# Altium PCB PCB1.PcbDoc
Units mm, origin at the board's own origin, x right, y up, seen from the top; angles counter-clockwise.
Board outline 53.5 x 43.25 mm, 2 copper layers (L1 (Signal), L4 (Signal)), stack 0.695 mm thick; 43 components, 44 nets, 206 pads, 83 vias.
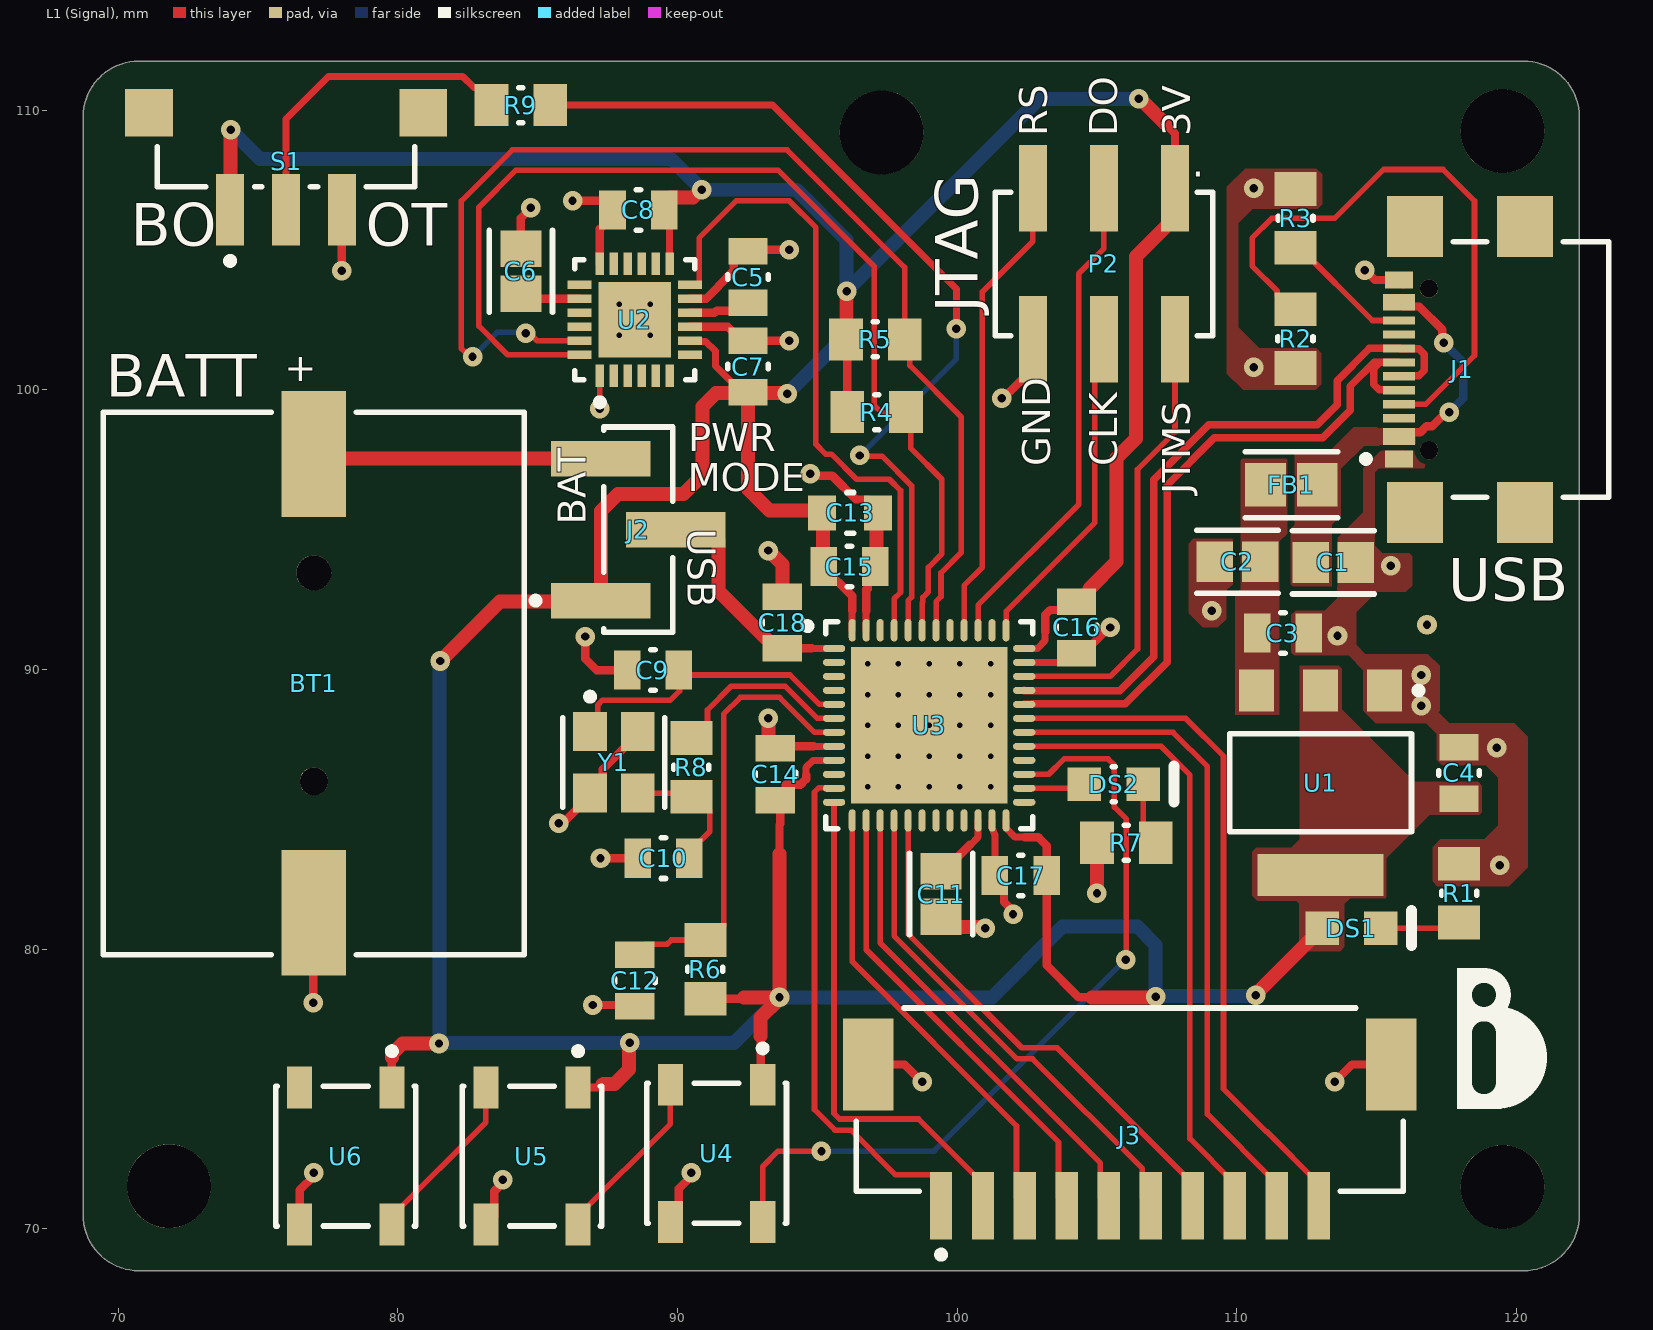
[diagram p0: L1 (Signal) view]
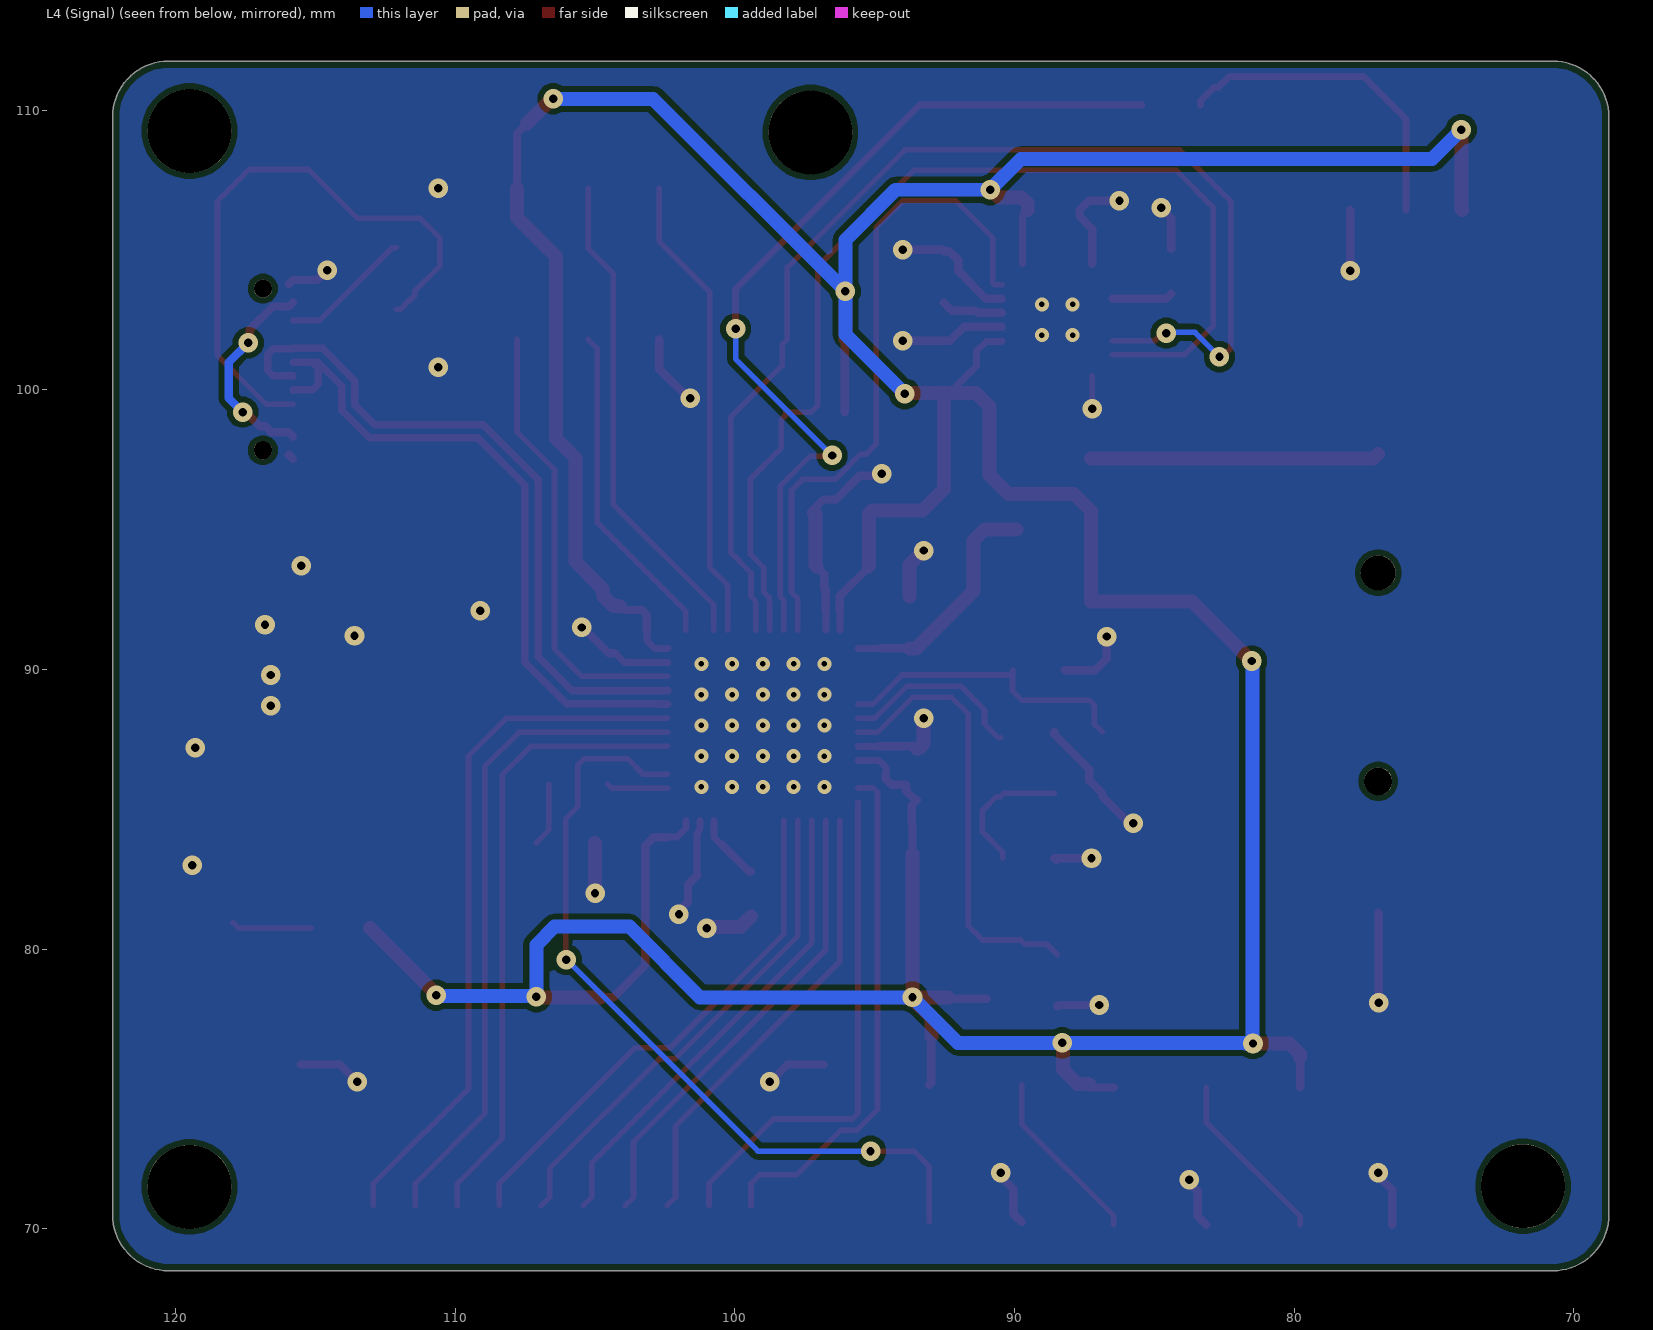
[diagram p1: L4 (Signal) view, seen from below]
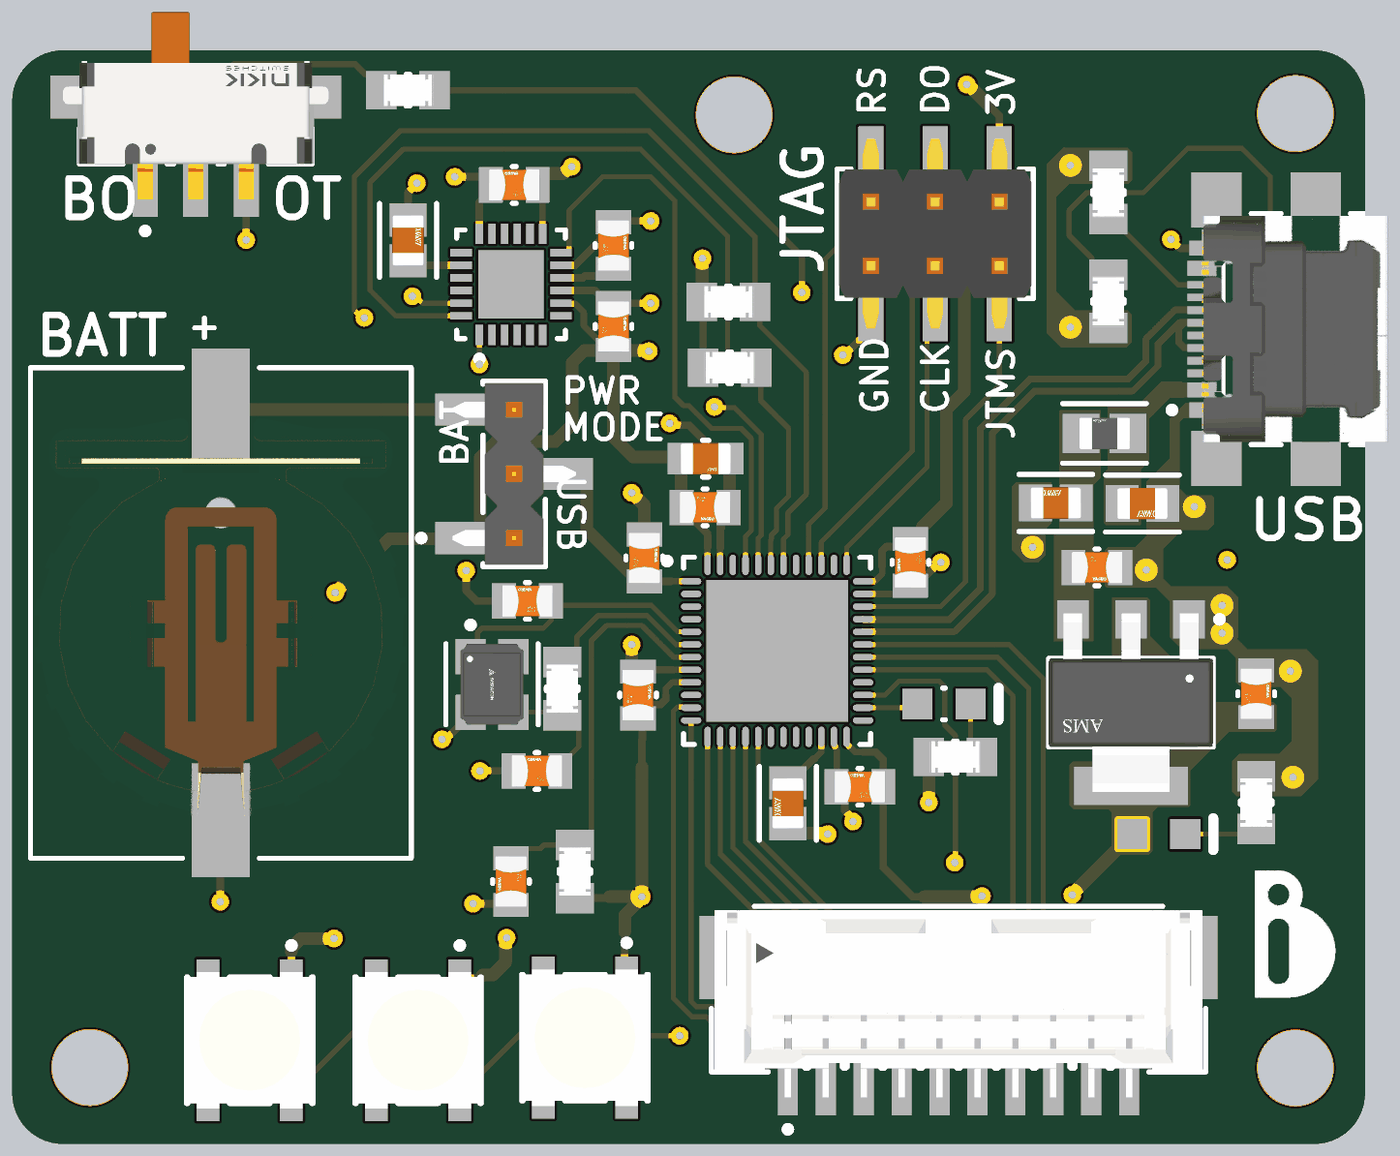
[diagram p2: 3D render of the assembled board from above, using the file's embedded part models]

## Layer stack, top to bottom
Top Solder: solder mask 0.0254, SM-001, Dk 4
L1 (Signal): signal copper 0.0152
Dielectric 3: core 0.665, Core-039, Dk 4.6
L4 (Signal): signal copper 0.0152
Bottom Solder: solder mask 0.0254, SM-001, Dk 4

## Board outline
68.75,70.5 68.75,109.75 cw(c70.75,109.75) 70.75,111.75 120.25,111.75 cw(c120.25,109.75) 122.25,109.75 122.25,70.5 cw(c120.25,70.5) 120.25,68.5 70.75,68.5 cw(c70.75,70.5)

## Design rules (kind name [scope] priority, off if disabled: settings)
Clearance Clearance_2 [InNamedPolygon('+5V_L01_P001')] p1: gap=0.254 ignorepadtopadclearanceinfootprint=FALSE except(0: Arc-Poly Arc-Region Track-Poly Track-Region SMDPad-Poly SMDPad-Region THPad-Poly THPad-Region Via-Poly Via-Region Fill-Poly Fill-Region Poly-Poly Poly-Region Region-Region)
Clearance Clearance_1 [InNamedPolygon('+5V_L01_P001')] p2: gap=0.254 ignorepadtopadclearanceinfootprint=FALSE except(0: Arc-Poly Track-Poly SMDPad-Poly THPad-Poly Via-Poly Fill-Poly Poly-Poly)
Clearance [All] p3: gap=0.2 ignorepadtopadclearanceinfootprint=FALSE
DiffPairsRouting [All] p1: maxlimit=0.203 minlimit=0.203 mostfreqgap=0.203 toplayer_minwidth=0.267 toplayer_maxwidth=0.6 toplayer_prefwidth=0.56 bottomlayer_minwidth=0.267 bottomlayer_maxwidth=0.6 bottomlayer_prefwidth=0.56 impedanceprofiledriven=TRUE impedanceprofileid={9241E178-140B-433B-9AB5-E28A3F8913A7} impedanceprofilevalue=90.000000 maxuncoupledlength=12.7
HoleSize [All] p1: absolutevalues=TRUE maxlimit=4 minlimit=0.025 maxpercent=80.000 minpercent=20.000
MinimumSolderMaskSliver [HasFootprint('IS-QFN-24_V') vs InPadClass('All Pads') And OnLayer('L1 (Signal)')] p1: minsoldermaskwidth=0.04
PolygonConnect [All] p1: thpad.connectstyle=Relief thpad.reliefconductorwidth=0.254 thpad.reliefentries=4 thpad.polygonreliefangle="90 Angle" thpad.airgapwidth=0.254 smdpad.connectstyle=Direct smdpad.reliefconductorwidth=0.254 smdpad.reliefentries=4 smdpad.polygonreliefangle="90 Angle" smdpad.airgapwidth=0.254 via.connectstyle=Direct via.reliefconductorwidth=0.254 via.reliefentries=4 via.polygonreliefangle="90 Angle" via.airgapwidth=0.254
RoutingVias [All] p1: holewidth=0.3 width=0.7 viastyle="Through Hole" minholewidth=0.25 minwidth=0.55 maxholewidth=0.4 maxwidth=0.9
SilkToSolderMaskClearance [IsPad] p1: minsilkscreentomaskgap=0.127 clearancetoexposedcopper=TRUE
SolderMaskExpansion [All] p1: expansion=0.102 istentingtop=FALSE
UnRoutedNet [All] p1: checkbadconnections=TRUE
Width [All] p1: maxlimit=1 minlimit=0.2 preferedwidth=0.3 minimp=50.000000 maximp=50.000000 favimp=50.000000
25 further rules are at their usual default settings.

## Classes and differential pairs
net class DIFF_USB: USB_D_N USB_D_P
differential pair USB_D: +USB_D_P -USB_D_N

## Components (designator, comment, footprint, x,y, rotation, side; value= is the part's Value field where it differs from the comment)
BT1 "CR-1220" FP-S8411-45R-MFG 77,89.5 r180 top
C1 "2u2" FP-0805-L_2_01_0_2-W_1_25-IPC_B 113.45,93.825 r0 top
C2 "2u2" FP-0805-L_2_01_0_2-W_1_25-IPC_B 110.025,93.85 r180 top
C3 "22u" FP-CC0805-0_85-MFG 111.65,91.3 r0 top value="100 nF"
C4 "22u" FP-CC0805-0_85-MFG 117.95,86.299 r90 top value="100 nF"
C5 "100n" FP-CC0805-0_85-MFG 92.529,104.029 r90 top value="100 nF"
C6 "2n2" FP-0805-L_2_01_0_2-W_1_25-IPC_B 84.404,104.235 r90 top
C7 "10n" FP-CC0805-0_85-MFG 92.529,100.829 r90 top value="100 nF"
C8 "100n" FP-CC0805-0_85-MFG 88.604,106.429 r180 top value="100 nF"
C9 "10p" FP-CC0805-0_85-MFG 89.125,89.975 r180 top value="100 nF"
C10 "10p" FP-CC0805-0_85-MFG 89.5,83.25 r180 top value="100 nF"
C11 "2u2" FP-0805-L_2_01_0_2-W_1_25-IPC_B 99.425,81.969 r270 top
C12 "100n" FP-CC0805-0_85-MFG 88.475,78.875 r270 top value="100 nF"
C13 "4.7u" FP-0805-L_2_01_0_2-W_1_25-MFG 96.175,95.6 r0 top
C14 "100n" FP-CC0805-0_85-MFG 93.5,86.25 r90 top value="100 nF"
C15 "100n" FP-CC0805-0_85-MFG 96.15,93.675 r0 top value="100 nF"
C16 "100n" FP-CC0805-0_85-MFG 104.275,91.5 r270 top value="100 nF"
C17 "100n" FP-CC0805-0_85-MFG 102.275,82.625 r180 top value="100 nF"
C18 "100n" FP-CC0805-0_85-MFG 93.75,91.675 r90 top value="100 nF"
DS1 "1K" AVAG-HSMX-C170_V 114.1,80.75 r0 top
DS2 "LTST-C170KRKT" LTST-C170KRKT_V 105.6,85.9 r0 top
FB1 "120R" FP-BLM21-0_2-t0_85-e0_5-IPC_A 111.95,96.6 r180 top
J1 "USB4110-GF-A" FP-USB4110-GF-A-MFG 119.48,100.725 r90 top
J2 "5-146128-1" FP-5-146128-1-MFG 88.6,95 r90 top
J3 "502584-1070" FP-502584-1070-MFG 106.175,74.62 r0 top
P2 "JTAG CONN" 61000621121 105.25,104.5 r180 top
R1 "1K" FP-CRCW0805-e3-IPC_A 117.95,81.999 r90 top
R2 "5K1" FP-CRCW0805-e3-IPC_A 112.1,101.825 r270 top
R3 "5K1" FP-CRCW0805-e3-IPC_A 112.102,106.127 r90 top
R4 "2K2" FP-CRCW0805-e3-IPC_A 97.125,99.2 r180 top
R5 "2K2" FP-CRCW0805-e3-IPC_A 97.075,101.8 r180 top
R6 "10K" FP-CRCW0805-e3-IPC_A 91,79.275 r90 top
R7 "1K" FP-CRCW0805-e3-IPC_A 106.051,83.8 r180 top
R8 "0R" FP-CRCW0805-e3-IPC_A 90.5,86.5 r90 top
R9 "10K" FP-CRCW0805-e3-IPC_A 84.4,110.175 r180 top
S1 "SS312SAH4-R" FP-SS312SAH4-R-MFG 76.006,109.256 r270 top
U1 "AMS1117-3.3" FP-AMS1117-IPC_C 112.996,85.95 r270 top
U2 "MPU-6050" IS-QFN-24_V 88.475,102.5 r90 top
U3 "STM32F411CEU6" STM-UFQFPN48_L 99,88 r0 top
U4 "SK6812" ADA-RGB-1655_V 91.4,72.7 r270 top
U5 "SK6812" ADA-RGB-1655_V 84.8,72.6 r270 top
U6 "SK6812" ADA-RGB-1655_V 78.14,72.6 r270 top
Y1 "24MHz" FP-ABM8G-MFG 87.725,86.675 r270 top

## Footprints (in the part's own frame and the unit in brackets; to place one, negate y for a bottom-side part, rotate by r counter-clockwise, add the part's x,y. Pads: shape width x height; smd on the part's side, far side on the other; paste and mask are expansions set on the pad)
61000621121 [mm] "Pin Header, pitch 2.54 mm, SMD, Vertical, dual row, 6p"
  rect 1x3.1 smd: 1(-2.54,-2.7) 2(-2.54,2.7) 3(0,-2.7) 4(0,2.7) 5(2.54,-2.7) 6(2.54,2.7)
  silkscreen extent -3.89,-2.56 3.89,2.57, body extent -3.81,-3.75 3.81,3.75, height 9.62
ADA-RGB-1655_V [mm] "SMD, 4-Leads, Body 5x5mm"
  rect 1.5x0.9 smd: 1(-2.45,1.65) 2(-2.45,-1.65) 3(2.45,-1.65) 4(2.45,1.65)
  silkscreen extent -3.87,-2.5 2.5,2.5, body extent -2.7,-2.5 2.7,2.5, height 1.68
AVAG-HSMX-C170_V [mm] "SMD, 2-Leads, Body 2x1.25mm, Height 0.8mm"
  rect 1.2x1.2 smd: 1(-1.05,0) 2(1.05,0)
  silkscreen extent 2.15,-0.63 2.15,0.63, body extent -1,-0.63 1,0.63, height 0.8
FP-5-146128-1-MFG [mm]
  rect 1.27x3.56 smd paste+0 mask+0: 1(-2.54,1.335) 2(0,-1.335) 3(2.54,1.335)
  silkscreen extent -3.67,-1.23 3.67,3.8, body extent -3.77,-3.21 3.77,3.21, height 0.25
FP-0805-L_2_01_0_2-W_1_25-IPC_B [mm]
  rect 1.305x1.456 smd paste+0 mask+0: 1(-0.806,0) 2(0.806,0)
  silkscreen extent -1.46,-1.13 1.46,1.13, body extent -1.71,-0.98 1.71,0.98, height 0.25
FP-0805-L_2_01_0_2-W_1_25-MFG [mm]
  rect 1x1.25 smd paste+0 mask+0: 1(-1,0) 2(1,0)
  silkscreen extent -0.13,-0.72 0.13,0.72, body extent -1.6,-0.82 1.6,0.82, height 0.25
FP-502584-1070-MFG [mm]
  rect 0.8x2.4 smd paste+0 mask+0: 1(-6.75,-3.795) 2(-5.25,-3.795) 3(-3.75,-3.795) 4(-2.25,-3.795) 5(-0.75,-3.795) 6(0.75,-3.795) 7(2.25,-3.795) 8(3.75,-3.795) 9(5.25,-3.795) 10(6.75,-3.795)
  rect 1.8x3.3 smd paste+0 mask+0: 11(-9.35,1.255) 12(9.35,1.255)
  silkscreen extent -9.77,-5.67 9.77,3.27, body extent -10.35,-5.1 10.35,3.37, height 0.25
FP-ABM8G-MFG [mm]
  rect 1.4x1.2 smd paste+0 mask+0: 1(-1.1,-0.85) 2(1.1,-0.85) 3(1.1,0.85) 4(-1.1,0.85)
  silkscreen extent -2.47,-1.83 1.6,1.83, body extent -1.9,-1.55 1.9,1.55, height 0.25
FP-AMS1117-IPC_C [mm]
  rect 1.5x1.25 smd paste+0 mask+0: 1(-3.295,2.29) 2(-3.295,0) 3(-3.295,-2.29)
  rect 1.504x4.5 smd paste+0 mask+0: 4(3.295,0)
  silkscreen extent -3.42,-3.25 1.75,3.63, body extent -3.53,-3.25 3.53,3.25, height 1.8
FP-BLM21-0_2-t0_85-e0_5-IPC_A [mm]
  rect 1.455x1.556 smd paste+0 mask+0: 1(-0.926,0) 2(0.926,0)
  silkscreen extent -1.65,-1.18 1.65,1.18, body extent -2.15,-1.28 2.15,1.28, height 0.25
FP-CC0805-0_85-MFG [mm]
  rect 0.95x1.4 smd paste+0 mask+0: 1(-0.925,0) 2(0.925,0)
  silkscreen extent -0.08,-0.72 0.08,0.72, body extent -1.6,-1.05 1.6,1.05, height 0.25
FP-CRCW0805-e3-IPC_A [mil]
  rect 47.5x59.38 smd paste+0 mask+0: 1(-41.37,0) 2(41.37,0)
  silkscreen extent -3,-25 3,25, body extent -85,-49 85,49, height 10
FP-S8411-45R-MFG [mm]
  rect 2.3x4.5 smd paste+0 mask+0: 1(0,8.2) 2(0,-8.2)
  round 1 hole 1 unplated paste-2539.97 mask+0: ""(0,3.5)
  round 1.25 hole 1.25 unplated paste-2539.97 mask+0: ""(0,-3.95)
  silkscreen extent -7.52,-9.7 7.52,9.7, body extent -7.63,-10.55 7.63,10.55, height 0.25
FP-SS312SAH4-R-MFG [mm]
  rect 2.55x1 smd paste+0 mask+0: 1(2.825,-2) 2(2.825,0) 3(2.825,2)
  rect 1.7x1.7 smd paste+0 mask+0: 4(-0.65,4.9) 5(-0.65,-4.9)
  silkscreen extent 0.58,-4.6 4.77,4.6, body extent -4.1,-5.85 4.2,5.85, height 0.25
FP-USB4110-GF-A-MFG [mm]
  rect 2.18x2 smd paste+0 mask+0: 1(-5.11,3.105) 2(5.11,3.105) 3(-5.11,-0.825) 4(5.11,-0.825)
  rect 0.6x1 smd paste+0 mask+0: A1-B12(-3.2,3.68) B1-A12(3.2,3.68)
  rect 0.6x1.15 smd paste+0 mask+0: A4-B9(-2.4,3.68) B4-A9(2.4,3.68)
  rect 0.3x1.15 smd paste+0 mask+0: A5(-1.25,3.68) A6(-0.25,3.68) A7(0.25,3.68) A8(1.25,3.68) B5(1.75,3.68) B6(0.75,3.68) B7(-0.75,3.68) B8(-1.75,3.68)
  round 0.65 hole 0.65 unplated paste-2539.97 mask+0: ""(-2.89,2.605) ""(2.89,2.605)
  silkscreen extent -4.57,-3.83 4.57,4.99, body extent -6.3,-3.92 6.3,4.36, height 0.25
IS-QFN-24_V [mm] "QFN, 24-Leads, Body 4x4mm, Pitch 0.5mm, Thermal Pad 2.7x2.6mm"
  rect 0.8x0.3 smd: 1(-2,1.25) 2(-2,0.75) 3(-2,0.25) 4(-2,-0.25) 5(-2,-0.75) 6(-2,-1.25) 13(2,-1.25) 14(2,-0.75) 15(2,-0.25) 16(2,0.25) 17(2,0.75) 18(2,1.25)
  rect 0.3x0.85 smd mask+0.102: 7(-1.25,-1.975) 8(-0.75,-1.975) 9(-0.25,-1.975) 10(0.25,-1.975) 11(0.75,-1.975) 12(1.25,-1.975) 19(1.25,1.975) 20(0.75,1.975) 21(0.25,1.975) 22(-0.25,1.975) 23(-0.75,1.975) 24(-1.25,1.975)
  rect 2.7x2.6 smd: 25(0,0)
  silkscreen extent -3.07,-2.15 2.15,2.15, body extent -2,-2 2,2, height 0.95
LTST-C170KRKT_V [mm] "SMD, 2-Leads, Body 2x1.25mm"
  rect 1.2x1.2 smd: 1(-1.05,0) 2(1.05,0)
  silkscreen extent -0.05,-0.64 2.16,0.64, body extent -1,-0.63 1,0.63, height 1.2
STM-UFQFPN48_L [mm] "QFN, 48-Leads, Body 7.1x7.1mm, Pitch 0.5mm, Thermal Pad 5.6x5.6mm, IPC High Density"
  oval 0.8x0.25 smd: 1(-3.4,2.75) 2(-3.4,2.25) 3(-3.4,1.75) 4(-3.4,1.25) 5(-3.4,0.75) 6(-3.4,0.25) 7(-3.4,-0.25) 8(-3.4,-0.75) 9(-3.4,-1.25) 10(-3.4,-1.75) 11(-3.4,-2.25) 12(-3.4,-2.75) 25(3.4,-2.75) 26(3.4,-2.25) 27(3.4,-1.75) 28(3.4,-1.25) 29(3.4,-0.75) 30(3.4,-0.25) 31(3.4,0.25) 32(3.4,0.75) 33(3.4,1.25) 34(3.4,1.75) 35(3.4,2.25) 36(3.4,2.75)
  oval 0.25x0.8 smd: 13(-2.75,-3.4) 14(-2.25,-3.4) 15(-1.75,-3.4) 16(-1.25,-3.4) 17(-0.75,-3.4) 18(-0.25,-3.4) 19(0.25,-3.4) 20(0.75,-3.4) 21(1.25,-3.4) 22(1.75,-3.4) 23(2.25,-3.4) 24(2.75,-3.4) 37(2.75,3.4) 38(2.25,3.4) 39(1.75,3.4) 40(1.25,3.4) 41(0.75,3.4) 42(0.25,3.4) 43(-0.25,3.4) 44(-0.75,3.4) 45(-1.25,3.4) 46(-1.75,3.4) 47(-2.25,3.4) 48(-2.75,3.4)
  rect 5.6x5.6 smd: 49(0,0)
  silkscreen extent -4.47,-3.7 3.7,3.7, body extent -3.55,-3.55 3.55,3.55, height 0.6

## Part data
BT1: library part CMP-15817-000007-1, "BATTERY HOLDER COIN 12MM SMD", Case/Package=SMD/SMT, Max Operating Temperature=105°C, Min Operating Temperature=-55°C, Package Quantity=500, Contact Plating=Bronze, Material=Polyphenylene, Mount="Surface Mount", Number of Batteries=1, Number of Cells=1, Packaging="Tape and Reel", REACH SVHC="No SVHC", Termination=SMD/SMT
C1 C2 C6 C11: library part CMP-2000-05810-2, "General Purpose Ceramic Capacitor, 0805, 2.2uF, 10%, X5R, 15%, 10V", Capacitance=2.2uF, Case Code (Imperial)=0805, Case Code (Metric)=2012, Dielectric=X5R, Dielectric Material=Ceramic, Insulation Resistance=500MR, Max Operating Temperature=85°C, Min Operating Temperature=-55°C, Package Quantity=1, Tolerance=10%, Voltage=10V, Case/Package=0805, Construction=Flat, Contact Plating=Tin, Depth=1.25mm, Dissipation Factor=5%, Height=1.4mm, Lead Free="Lead Free", Length=2.01mm, Mount="Surface Mount", Number of Pins=2, Packaging="Tape and Reel", Radiation Hardening=No, REACH SVHC="No SVHC", RoHS Compliant=Yes, Series=-, Size=1.4mm, Termination=SMD/SMT, Thickness=0.055inch, Voltage Rating=10V, Voltage Rating (DC)=10V, Width=0.049inch
C3 C4 C5 C7 C8 C9 C10 C12 C14 C15 C16 C17 C18: library part CMP-1036-04402-6, "CAP CER 0.1UF 16V X7R 0805", Capacitance="100 nF", Manufacturer=Yageo, Manufacturer Part Number=CC0805KRX7R7BB104, Package=CC0805-0.85, Temperature="-30°C to +85°C", Temperature Characteristic=X7R, Temperature Range High=+85°C, Temperature Range Low=-30°C, Tolerance=0.1, Voltage Rating="16 V", Automotive=No, Category=Cap, ComponentLink2Description=Datasheet, ComponentLink2URL=http://www.yageo.com/documents/recent/UPY-GPHC_Y5V_6.3V-to-50V_8.pdf, Device Class L1="Passive Components", Device Class L2=Capacitors, Device Class L3="Ceramic Capacitors", Digikey Description="CAP CER 0.1UF 16V X7R 0805", Footprint Url=http://www.yageo.com/exep/pages/download/literatures/UPY-C_GEN_24.pdf, Height=0.95mm, Ipc Land Pattern Name=CAPC200125X85, Lead Free=Yes, Material=Ceramic, Mouser Description="Multilayer Ceramic Capacitors MLCC - SMD/SMT 100nF 16V X7R 10%", Octopart=https://octopart.com/cc0805krx7r7bb104-yageo-39467769, RoHS=TRUE
C13: library part CMP-2007-04518-2, "General Purpose Ceramic Capacitor, 0805, 4.7uF, 10%, X7R, 15%, 16V", Capacitance=4.7uF, Case Code (Imperial)=0805, Case Code (Metric)=2012, Dielectric=X7R, Max Operating Temperature=125°C, Min Operating Temperature=-55°C, Package Quantity=1, Tolerance=10%, Voltage=10V, Voltage Rating=16V, Case/Package=0805, Construction=Flat, Contact Plating=Tin, Depth=1.25mm, Dissipation Factor=3.5%, Height=1.52mm, Lead Free="Lead Free", Length=2.01mm, Mount="Surface Mount", Number of Pins=2, Packaging="Tape and Reel", Radiation Hardening=No, REACH SVHC="No SVHC", RoHS Compliant=Yes, Series=-, Termination=SMD/SMT, Thickness=0.06inch, Voltage Rating (DC)=16V, Width=0.049inch
DS1: library part CMP-2000-05062-1, "Chip LED, Green, 2.2 V, -40 to 85 degC, 2-Pin SMD, Pb-Free, Tape and Reel", Forward Current If=20mA, Forward Voltage=2.2V, Forward Voltage VF Max=2.6V, LED Colour=Green, Manufacturer=Avago, Operating Temperature Max=85degC, Operating Temperature Min=-30degC, Operating Temperature Range=-30degCto+85degC, Opto Case Style=SMD, Package Description="2-Pin Surface Mount Device, Body 2 x 1.25 mm, Height 0.8 mm", Package Reference=HSMX-C170, Storage Temperature Min=-40degC, Bulb Size=1.25mmx1.4mm, Datasheet URL=https://datasheet.ciiva.com/29280/180495-da-01-en-chip-led-hsmg-c170-gelb-gruen-29280971.pdf, Datasheet Version=Oct-08, Dominant Wavelength=572nm, Dominant Wavelength Typ=572nm, External Depth=0.8mm, External Length / Height=2mm, External Width=1.25mm, Forward Current If Max=20mA, LED Mounting=SMD, LED Type=Standard, Lens Shape=Rectangular, Light Area Height=1mm, Luminous Intensity=15mcd, Luminous Intensity Min=4mcd, Luminous Intensity Typ=15mcd, Manufacturer URL=http://www.avagotech.com/, Mounting Type=SMD, MSL=MSL2A-4weeks, No. of Pins=2, Opto Mounting Orientation=Top, Packaging=CutTape, Peak Forward Current=20mA, Peak Wavelength=570nm, PIV Max=5V, Storage Temperature Max=85degC, SVHC=NoSVHC(16-Jun-2014), Viewing Angle=170deg, Voltage Vf Typ=2.2V, Wavelength Typ=570nm
DS2: library part CMP-2000-07593-1, "LED Red, 75 mW, 54 mcd, -55 to 85 degC, 2-Pin SMD, RoHS, Tape and Reel", Case Code (Imperial)=0805, Case Code (Metric)=2012, Colour=Red, Forward Current=30mA, Forward Voltage=2V, Lens Colour=Colorless, Manufacturer=Lite-On, Max Operating Temperature=85degC, Min Operating Temperature=-55degC, Package Description="2-Pin Surface Mount Device, Body 2 x 1.25 mm", Package Quantity=1, Package Reference=C170KRKT, Power Dissipation=75mW, Test Current=20mA, Case\/Package=0805, Datasheet URL=http://optoelectronics.liteon.com/upload/download/DS-22-99-0150/LTST-C170KRKT.pdf, Datasheet Version="Rev. D, 11/2014", Depth=1.6mm, Dominant Wavelength=631nm, Height=1.1mm, Illumination Colour=Red, Lead Free=LeadFree, Length=3.2mm, Lens Style=Rectangular, Lens Transparency=Clear, Luminous Intensity=54mcd, Manufacturer URL=http://www.us.liteon.com/, Mount=SurfaceMount, Mounting Technology=SurfaceMount, Number of Elements=1, Number of LEDs=1, Number of Pins=2, Packaging=TapeandReel, Power Rating=75mW, Radiation Hardening=No, RoHSCompliant=True, Viewing Angle=130degrees, Wavelength=639nm, Width=1.25mm
FB1: library part CMP-0686-00716-3, "FERRITE BEAD 120 OHM 0805 1LN", Case Code (Imperial)=0805, Case Code (Metric)=2012, Current Rating=800mA, DC Current=200mA, DC Resistance (DCR)=100mR, Frequency=100MHz, Max Current Rating=1A, Max Operating Temperature=125°C, Min Operating Temperature=-55°C, Package Quantity=1, Resistance=150mR, Tolerance=25%, Case/Package=0805, Core Material=Ferrite, DC Resistance-Max=100mR, Depth=1.25mm, Height=0.85mm, Impedance=120R, Lead Free="Lead Free", Length=2mm, Material=Steel, Max DC Current=200mA, Military Standard=Not, Number of Circuits=1, Number of Lines=1, Number of Pins=2, Packaging="Tape and Reel", Radiation Hardening=No, REACH SVHC="No SVHC", Series=BLM21A, Shielding=Unshielded, Termination=SMD/SMT, Test Frequency=100MHz, Width=1.25mm
J1: library part CMP-245163-000002-1, "CONN USB 2.0 TYPE-C R/A SMT", Current Rating=3/4.25/1.25/0.25A, Manufacturer=GCT, Package=0, Temperature="-40°C to +85°C", Temperature Range High=+85°C, Temperature Range Low=-40°C, Voltage Rating=20V, Automotive=No, Category=Conn, ComponentLink2Description=Datasheet, ComponentLink2URL=https://gct.co/files/drawings/usb4110.pdf, Conn Orientation="Right Angle", Contact Material=Gold,Nickel, Device Class L1=Connectors, Device Class L2="USB Connectors", Device Class L3=unset, Digikey Description="CONN USB 2.0 TYPE-C R/A SMT", Height=3.46mm, Is Female=yes, Lead Free=Yes, Manufacturer Part Number=USB4110-GF-A, Number Of Contacts=16, Octopart=https://octopart.com/usb4110-gf-a-gct-103941985, RoHS=TRUE, Shielding=true, Standoff Height=0.1mm, Usb Standard="USB 2.0"
J2: library part CMP-03369-000030-1, "CONN HEADER SMD 3POS 2.54MM", Current Rating=3A, Manufacturer=TE, Package=HDR3, Temperature="-65°C to +125°C", Temperature Range High=+125°C, Temperature Range Low=-65°C, Voltage Rating=30V, Automotive=No, Category=Conn, ComponentLink2Description=Datasheet, ComponentLink2URL=https://www.te.com/global-en/product-5-146128-1.html, Conn Gender=Male, Conn Orientation=Straight, Contact Material=Gold,Nickel, Device Class L1=Connectors, Device Class L2="Headers and Wire Housings", Device Class L3=unset, Digikey Description="CONN HEADER SMD 3POS 2.54MM", Footprint Url=https://www.te.com/commerce/DocumentDelivery/DDEController?Action=srchrtrv&DocNm=146128&DocType=Customer+Drawing&DocLang=English, Height=10.1092mm, Lead Free=Yes, Manufacturer Part Number=5-146128-1, Mouser Description="AMPMODU 3 Position Surface Mount Single Row Straight 2.54 mm Breakaway Header", Number Of Contacts=3, Number of Rows=1, Octopart=https://octopart.com/5-146128-1-te+connectivity-40948200, Pitch=2.54mm, RoHS=TRUE
J3: library part CMP-00257-18669480-1, "502584-1070 1.5 W/B Sgl ST RecAssy10CktEmbsTpPkg", Case/Package=SIL, Color=Beige, Current Rating=2A, Manufacturer Lifecycle Status=ACTIVE, Max Operating Temperature=85°C, Min Operating Temperature=-40°C, Voltage Rating=100V, Connector Type="Center Strip Contact, Receptacle", Contact Gender=Female, Contact Material="Copper, Tin", Contact Plating=Tin, Country of Origin=JP, Depth=6.35mm, Fastening Type=Latch, Gender=Receptacle, Glow Wire Compliant=Non-compliant, Height=7.5mm, Housing Color=Beige, Housing Material=Resin, Length=19.3mm, Lifecycle Status=Production, Mount="Surface Mount", NexarPartId=18669480, Number of Circuits=10, Number Of Contacts=10, Number of Pins=10, Number of Positions=10, Number of Rows=1, Orientation=Vertical, Packaging="Cut Tape", Pitch=1.5mm, Radiation Hardening=No, REACH SVHC=Unknown, RoHS=Compliant, Termination=Solder
P2: library part CMP-1502-01024-2, Color=Black, Contact Resistance=20mΩ, Current Rating=3A, Operating Supply Voltage=250V, Connector Type="Male Pin", Contact Material=Copper, Contact Mating Length=5.9944mm, Contact Plating=Gold, Gender=Male, Lead Pitch=2.54mm, Mount="Surface Mount", NexarPartId=32855428, Number Of Contacts=6, Number of Pins=6, Number of Positions=6, Number of Rows=2, Orientation=Vertical, Pitch=2.54mm, REACH SVHC=Unknown, RoHS=Compliant, Row Spacing=2.54mm, Termination=Solder
R1 R2 R3 R4 R5 R6 R7 R8 R9: library part CMP-2001-04908-2, "RES Thick Film, 10kΩ, 1%, 0.125W, 100ppm/°C, 0805", Case Code (Imperial)=0805, Case Code (Metric)=2012, Max Operating Temperature=155°C, Min Operating Temperature=-55°C, Package Quantity=5000, Power Rating=125mW, Resistance=10kR, Temperature Coefficient=100ppm/°C, Tolerance=1%, Voltage Rating=150V, Case/Package=0805, Composition="Thick Film", Contact Plating=Tin, Depth=1.25mm, Height=0.45mm, Lead Free="Lead Free", Length=2mm, Military Standard=Not, Packaging="Tape and Reel", Radiation Hardening=No, Termination=SMD/SMT, Voltage Rating (DC)=150V, Weight=0.000194oz, Width=1.25mm
S1: library part CMP-31746-000001-1, "SWITCH SLIDE SPDT 0.4VA 28V", Case/Package=SMD/SMT, Max Current Rating=100mA, Max Operating Temperature=85°C, Max Voltage Rating (AC)=28V, Min Operating Temperature=-25°C, Package Quantity=1, Actuator Length=2mm, Actuator Material=Polyphenylene, Actuator Type=Standard, Contact Material=Bronze, Contact Plating=Gold, Contact Style=Shorting, Depth=7.45mm, Electrical Life=10000Cycles, Housing Material=Bronze, Lead Free="Lead Free", Length=10.5mm, Max Voltage Rating (DC)=28V, Mechanical Life=10000Cycles, Mount="Surface Mount", Orientation="Right Angle", Packaging="Tape and Reel", REACH SVHC="No SVHC", RoHS Compliant=Yes, Series=SS3, Switch Function=On-On, Switch Travel=2mm, Termination="Gull Wing", Throw Configuration=SPDT, Voltage Rating (AC)=28V, Voltage Rating (DC)=28V
U1: library part CMP-209535-000001-1, "LDO Voltage Regulators 1A, 3.3V", Dropout Voltage=1.1V, Manufacturer="Advanced Monolithic Systems", Max Junction Temp=+125°C, Max Power Dissipation=1.2W, Max Supply Voltage=15V, Nominal Supply Current=5mA, Output Current=1A, Output Voltage=3.3V, Package=AMS1117, Temperature="-40°C to +125°C", Temperature Range Low=-40°C, Automotive=No, Category=IC, ComponentLink2Description=Datasheet, ComponentLink2URL=http://www.advanced-monolithic.com/pdf/ds1117.pdf, Device Class L1="Integrated Circuits (ICs)", Device Class L2="Power Management ICs", Device Class L3="Voltage Regulators - Linear", Height=1.8mm, Ipc Land Pattern Name=SOT229P700X180-4, Lead Free=Yes, Manufacturer Part Number=AMS1117-3.3, Number Of Outputs=1, Octopart=https://octopart.com/ams1117-3.3-advanced+monolithic+systems-25899300, Output Type=Fixed, RoHS=TRUE, Standoff Height=0.64mm, Temperature Range High=+125°C
U2: library part CMP-1753-00002-2, "3-Axis Gyroscope, Accelerometer and a Digital Motion Processor(TM) (DMP), 2.375 to 3.46 V, -40 to 85 degC, 24-Pin QFN, RoHS, Tape and Reel", Manufacturer=InvenSense, Standard Package=5,000, Category=Sensors,Transducers, Datasheet URL=http://datasheet.octopart.com/MPU-6050-InvenSense-datasheet-14421344.pdf, Datasheet Version="Rev. 3.3, 05/2012", Dynamic Catalog=MPU-6000™Series, Family=Multifunction, Featured Product=MPU-60506-Axis,IntegratedI²CSolution, Manufacturer URL=http://www.invensense.com/, Online Catalog=MPU-6000™Series, Other Names="1428-1007-2 / MPU6050", Output Type=Digital, Sensor Type=MotionTracking, Unit PriceUSD=Digital
U3: library part CMP-0243-00165-1, "ARM Cortex-M4 32-bit MCU+FPU, 512 KB Flash, 128 KB RAM, 36 I/Os, 48-Pin UFQFPN, -40 to 85 degC, Tray", I/Os (High Current)=36, Operating Frequency(F) (Processor speed) (MHz)=100, Package Description=UFQFPN48, Package Reference="48-Pin Ultra Thin Fine Pitch Quad Flat No-Lead, 7 x 7 x 0.6 mm Body, 0.5 mm Pitch, Exposed Pad", Supply Voltage(Vcc) min (V)=1.7, ComponentLink1Description="Manufacturer URL", ComponentLink1URL=http://www.st.com/, ComponentLink2Description=Datasheet, ComponentLink2URL=http://www.st.com/st-web-ui/static/active/en/resource/technical/document/datasheet/DM00115249.pdf, Core="ARM Cortex-M4", DatasheetVersion="Rev. 6", FLASH Size (Prog) (kB)=512, Internal RAM Size (kB)=128, Mounting Technology="Surface Mount", Packing=Tray
U4 U5 U6: library part CMP-2000-05026-1, "Intelligent Control LED Integrated Light Source, 3.5 to 5.3 V, -25 to 80 degC, 4-Pin SMD, RoHS, Tape and Reel", Color=Red,Green,Blue(RGB), Manufacturer=Adafruit-Industries-LLC, Package Description="4-Pin Surface Mount Device, Body 5 x 5 mm", Package Reference=1655, Category=Optoelectronics, Configuration=Discrete, Controller Type=-, Datasheet URL=http://datasheet.octopart.com/ADA1655-Adafruit-Industries-datasheet-32028139.pdf, Datasheet Version=May-13, Family=Addressable,Specialty, Interface=-, Manufacturer URL=https://www.adafruit.com/, Mounting Type=SurfaceMount, Number of LEDs=10, Series=Neopixel, Size / Dimension=5.00mmLx5.00mmW, Utilized LED=WS2812(5050)
Y1: library part CMP-27762-015229-1, "Crystal 24MHz ±30ppm (Tol) ±30ppm (Stability) 10pF FUND 60Ω 4-Pin SMD T/R", Case/Package=CSMD, ESR (Equivalent Series Resistance)=60R, Frequency Stability=30ppm, Load Capacitance=10pF, Max Operating Temperature=70°C, Min Operating Temperature=-20°C, Operating Frequency="24 MHz", Package Quantity=1000, Depth=2.5mm, Frequency=24MHz, Frequency Tolerance=30ppm, Height=1mm, Lead Free="Lead Free", Length=3.2mm, Mount="Surface Mount", Number of Pins=4, Packaging="Tape and Reel", Series=ABM8G, Series Resistance=60R, Termination=SMD/SMT, Tolerance=30ppm, Width=2.5mm

## Free pads (board coordinates)
  round 3 hole 3: MH(97.3,109.2) MH(119.5,71.5) MH(119.5,109.25) MH1(71.816,71.52)

## Via types
v1: diameter 0.7, hole 0.3, L1 (Signal) to L4 (Signal), 54 vias
v2: diameter 0.5, hole 0.2, L1 (Signal) to L4 (Signal), 29 vias

## Nets (pads, with @x,y where several pads share a name; then routed paths per layer and width w, separated by ;. In a path a pad name is that pad's centre, name@x,y a point inside that pad or via, vN(x,y) a via of type N, cw(c..) or ccw(c..) an arc to the next point about the centre after c; other vN are vias at no path point)
+3V3: C4.1 C7.1 C8.1 C13.1 C14.1 C15.1 C16.1 C17.1 DS1.1 J2.1 P2.1 R4.2 R5.2 R6.1 S1.1 U1.2 U1.4 U2.8 U2.13 U3.9 U3.24 U3.36 U3.48 U4.1 U5.1 U6.1 | length 194.3
  L1 (Signal) w0.25: C8.1 89.725,106.234 U2.13 ; U2.8 90.475,101.725 91.01,101.725 91.354,101.38 91.354,100.854 C7.1@92.304,99.904 ; 94.6,86.225 94.6,86.5 94.85,86.75 U3.9 ; U3.48 96.25,92.1 ; U3.24 101.75,84.325 102.075,84 102.425,84 ; U3.36 102.875,90.75 103.15,91.025 103.15,91.35
  L1 (Signal) w0.3: U6.1 79.79,76.115 ; U5.1 87.225,75.05 87.325,75.15 ; J2.1@87.23,92.425 J2.1 ; R6.1 92.324,78.224 92.375,78.275 ; 92.975,76.9 92.975,75.225 U4.1 ; 93.65,83.4 93.65,84.45 93.675,84.475 93.675,85.15 C14.1 93.55,85.325 93.875,85.65 93.875,85.875 94.399,85.875 94.6,86.076 94.6,86.225 ; C15.1 95.225,93.65 96.25,92.625 96.25,92.1 ; R5.2 96.074,101.75 R4.2 ; 102.425,84 102.9,84 102.999,83.901 103.2,83.7 C17.1 103.2,79.425 104.35,78.275 104.825,78.275 ; 103.15,91.35 103.15,91.949 103.326,92.124 103.974,92.124 C16.1@104.125,92.275 ; 107.425,109.525 107.79,109.16 P2.1
  L1 (Signal) w0.5: S1.1 74.013,106.438 74.013,109.288 v1(74.025,109.3) ; 79.79,76.115 79.79,76.247 80.168,76.625 v1(81.475,76.625) ; v1(81.525,90.3) 83.65,92.425 87.23,92.425 J2.1@87.265,92.425 ; J2.1 87.265,95.66 87.88,96.275 90.225,96.275 90.9,96.95 90.9,99.4 91.375,99.875 C7.1@92.275,99.875 ; 87.325,75.15 87.35,75.175 87.75,75.175 88.262,75.687 88.262,76.612 v1(88.3,76.65) ; C8.1 89.529,106.654 89.754,106.879 90.55,106.879 90.821,107.15 v1(90.875,107.15) ; 92.375,78.275 v1(93.65,78.275) ; 92.975,76.9 92.975,77.546 93.65,78.221 v1(93.65,78.275) ; 93.65,83.4 v1(93.65,78.275) ; v1(93.925,99.85) 93.898,99.877 92.556,99.877 C7.1 92.529,96.446 93.3,95.675 95.1,95.675 C13.1 95.2,95.575 95.2,93.7 C15.1 ; R5.2 96.037,101.813 96.037,103.512 v1(96.05,103.525) ; C16.1@104.125,92.275 104.35,92.275 104.725,92.65 104.725,92.875 105.7,93.85 105.7,97.553 106.4,98.253 106.4,104.76 107.79,106.15 P2.1 ; 104.825,78.275 107.075,78.275 v1(107.1,78.3) ; v1(106.5,110.4) 106.55,110.4 107.425,109.525 ; v1(110.675,78.35) 110.675,78.375 DS1.1
  L4 (Signal) w0.5: v1(74.025,109.3) 75.075,108.25 89.775,108.25 v1(90.875,107.15) 94.25,107.15 96.05,105.35 v1(96.05,103.525) ; v1(81.525,90.3) 81.5,90.275 81.5,76.65 v1(81.475,76.625) 81.75,76.625 81.775,76.65 v1(88.3,76.65) 92.025,76.65 v1(93.65,78.275) 101.25,78.275 103.775,80.8 106.45,80.8 107.1,80.15 v1(107.1,78.3) 107.125,78.325 110.65,78.325 v1(110.675,78.35) ; v1(93.925,99.85) 96.05,101.975 v1(96.05,103.525) ; v1(106.5,110.4) 102.925,110.4 v1(96.05,103.525)
+5V: C2.1 C3.1 FB1.2 U1.3
+VBAT: C18.1 J2.2 U3.1 | length 8.5
  L1 (Signal) w0.25: 94.8,90.75 U3.1
  L1 (Signal) w0.3: C18.1 94.8,90.75
  L1 (Signal) w0.5: J2.2 91.08,95 91.465,94.615 91.465,92.81 93.525,90.75 C18.1
ADDR_LED1_IN: U3.27 U4.4 | length 28.7
  L1 (Signal) w0.2: U4.4 93.05,72.225 93.6,72.775 v1(95.15,72.775) ; U3.27 103.276,86.25 103.826,86.8 105.4,86.8 105.625,86.575 105.625,85.075 106.05,84.65 106.05,79.65 v1(106.025,79.625)
  L4 (Signal) w0.2: v1(95.15,72.775) 99.175,72.775 v1(106.025,79.625)
ADDR_LED1_OUT: U4.2 U5.4 | length 6.4
  L1 (Signal) w0.2: U5.4 86.45,70.45 89.75,73.75 U4.2
ADDR_LED2_OUT: U5.2 U6.4 | length 6.3
  L1 (Signal) w0.2: U6.4 79.79,70.45 83.15,73.81 U5.2
ADDR_LED3_OUT: U6.2
BAT+: BT1.2 J2.3 | length 10.3
  L1 (Signal) w0.5: BT1.2 77.16,97.54 J2.3
GND: BT1.1 C1.2 C2.2 C3.2 C4.2 C5.2 C6.2 C7.2 C8.2 C9.2 C10.2 C11.2 C12.2 C13.2 C14.2 C15.2 C16.2 C17.2 C18.2 J1.A1-B12 J1.B1-A12 J3.11 J3.12 P2.6 R1.2 R2.2 R3.2 R7.2 S1.3 U1.1 U2.1 U2.9 U2.11 U2.18 U2.25 U3.8 U3.23 U3.35 U3.47 U3.49 U4.3 U5.3 U6.3 Y1.2 Y1.4 | length 68.4
  L1 (Signal) w0.2: v1(87.225,99.325) U2.1
  L1 (Signal) w0.25: 94.875,87.25 U3.8 ; U3.47 96.75,92.075 ; U3.23 101.25,84.325 101.35,84.089 C17.2 ; U3.35 103.95,90.25 C16.2
  L1 (Signal) w0.3: U6.3 76.49,71.382 77,71.892 v1(77,72) ; v1(76.975,78.075) 76.975,81.275 BT1.1 ; v1(78,104.25) 78,106.425 S1.3 ; U5.3 83.45,70.45 83.45,71.342 83.75,71.642 v1(83.75,71.75) ; C6.2 84.404,106.139 84.75,106.485 v1(84.75,106.5) ; v1(85.75,84.5) 85.827,84.577 85.977,84.577 86.875,85.475 Y1.2 87.325,86.025 87.325,86.425 88.575,87.675 Y1.4 ; v1(86.25,106.75) 87.359,106.75 C8.2 87.679,106.204 87.225,105.75 U2.18 ; v1(86.7,91.175) 86.706,91.169 86.706,90.375 87.106,89.975 C9.2 ; v1(86.975,78) 88.425,78 C12.2 ; v1(87.25,83.25) 88.5,83.25 88.5,83.175 C10.2 ; U4.3 90.05,70.55 90.05,71.442 90.5,71.892 v1(90.5,72) ; U2.9 91.809,102.25 92.304,101.754 C7.2 92.534,101.75 v1(94,101.75) ; U2.11 91.02,103.25 91.479,103.709 91.479,103.724 92.014,104.259 92.014,104.629 92.339,104.954 C5.2 92.575,105 v1(94,105) ; C14.2 93.575,87.25 94.875,87.25 ; v1(94.75,97) 94.827,96.923 95.535,96.923 96.383,96.075 96.825,96.075 97.175,95.725 C13.2 ; 96.75,92.075 96.75,92.875 96.8,92.875 96.8,93.4 C15.2 ; J3.11 98.125,75.875 v1(98.75,75.25) ; C17.2 101.675,82.3 101.675,81.683 102,81.358 v1(102,81.25) ; v1(101.6,99.7) 101.66,99.7 102.71,100.75 P2.6 ; C16.2 104.5,90.575 105.425,91.5 v1(105.475,91.5) ; v1(113.5,75.25) 114.125,75.875 J3.12 ; v1(114.575,104.275) 114.586,104.275 114.936,103.925 J1.B1-A12 J1.B1-A12@115.95,103.775 ; J1.A1-B12 J1.A1-B12@115.95,97.675
  L1 (Signal) w0.5: v1(93.25,88.25) 93.25,87.425 ccw(c93.5,87.425) C14.2 ; v1(93.25,94.25) 93.75,93.75 C18.2 ; C15.2 97.125,93.725 97.125,95.55 C13.2 ; C11.2 99.8,80.788 100.962,80.788 v1(101,80.75) ; v1(105,82) R7.2
  other v1: 119.4,83 119.3,87.2 116.6,88.7 116.6,89.8 113.6,91.2 116.8,91.6 109.1,92.1 115.5,93.7 110.6,100.8 110.6,107.2
  other v2: 96.8,85.8 97.9,85.8 99,85.8 100.1,85.8 101.2,85.8 96.8,86.9 97.9,86.9 99,86.9 100.1,86.9 101.2,86.9 96.8,88 97.9,88 99,88 100.1,88 101.2,88 96.8,89.1 97.9,89.1 99,89.1 100.1,89.1 101.2,89.1 96.8,90.2 97.9,90.2 99,90.2 100.1,90.2 101.2,90.2 87.925,101.95 89.025,101.95 87.925,103.05 89.025,103.05
IMU_CPOUT: C6.1 U2.20 | length 2.2
  L1 (Signal) w0.3: C6.1 84.584,103.25 U2.20
IMU_INT: U2.12 U3.45 | length 23.6
  L1 (Signal) w0.2: U2.12 90.725,103.75 90.775,103.8 90.775,105.425 92.1,106.75 94,106.75 94.95,105.8 94.95,98.05 95.3,97.7 95.506,97.7 96.406,96.8 97.575,96.8 97.975,96.4 97.975,92.75 97.75,92.525 U3.45
IMU_REGOUT: C5.1 U2.10 | length 2.2
  L1 (Signal) w0.3: U2.10 91.325,102.75 91.404,102.829 92.254,102.829 C5.1
IMU_SCL: R5.1 U2.23 U3.42 | length 42.6
  L1 (Signal) w0.2: v1(82.675,101.175) 82.65,101.2 82.55,101.2 82.275,101.475 82.275,106.75 84.1,108.575 93.925,108.575 98.126,104.374 R5.1 98.312,101.614 98.312,100.863 100.15,99.025 100.15,94.175 99.425,93.45 99.425,92.6 99.25,92.425 U3.42 ; v1(84.575,102.025) 84.71,102.025 84.985,101.75 U2.23
  L4 (Signal) w0.2: v1(82.675,101.175) 83.55,102.05 84.55,102.05 v1(84.575,102.025)
IMU_SDA: R4.1 U2.24 U3.43 | length 39.2
  L1 (Signal) w0.2: U2.24 83.925,101.25 82.9,102.275 82.9,106.525 84.225,107.85 93.6,107.85 97.037,104.413 97.037,99.435 97.273,99.2 R4.1 ; R4.1 98.175,99.101 98.349,98.926 98.349,97.901 99.45,96.8 99.45,94.125 98.975,93.65 98.975,92.775 98.775,92.575 98.775,92.419 98.75,92.394 U3.43
LED_PWR_K: DS1.2 R1.1 | length 2.9
  L1 (Signal) w0.2: DS1.2 117.752,80.75 R1.1
MCU_BOOT0: R9.1 U3.44 | length 32.1
  L1 (Signal) w0.2: v1(96.525,97.65) 96.55,97.625 97.316,97.625 98.375,96.566 98.375,92.584 98.25,92.459 U3.44
  L1 (Signal) w0.25: R9.1 93.4,110.175 99.975,103.6 v1(99.975,102.175)
  L4 (Signal) w0.2: v1(96.525,97.65) 99.975,101.1 v1(99.975,102.175)
MCU_BOOT_SW: R9.2 S1.2 | length 11.7
  L1 (Signal) w0.25: S1.2 76,106.438 76,109.675 77.525,111.2 82.324,111.2 82.72,110.804 82.871,110.804 83.349,110.326 R9.2
MCU_JTCLK: P2.4 U3.37 | length 11.8
  L1 (Signal) w0.2: U3.37 101.75,92.075 104.925,95.25 104.925,101.475 P2.4
MCU_JTD0: P2.3 U3.39 | length 17.7
  L1 (Signal) w0.2: U3.39 100.75,92.3 104.35,95.9 104.35,104.15 105.25,105.05 P2.3
MCU_JTDI: U3.38
MCU_JTMS: P2.2 U3.34 | length 16.1
  L1 (Signal) w0.2: U3.34 105.475,89.75 106.45,90.725 106.45,97.15 107.79,98.49 P2.2
MCU_JTRST: P2.5 U3.40 | length 16.8
  L1 (Signal) w0.2: U3.40 100.25,93 100.9,93.65 100.9,103.5 102.71,105.31 P2.5
MCU_LED_A: DS2.1 U3.26 | length 2.2
  L1 (Signal) w0.2: U3.26 104.4,85.75 DS2.1
MCU_LED_K: DS2.2 R7.1 | length 2.3
  L1 (Signal) w0.2: DS2.2 106.65,84.252 R7.1
MCU_NRST: C12.1 R6.2 U3.7 | length 15.9
  L1 (Signal) w0.2: C12.1 88.85,80.175 89.635,80.175 89.786,80.326 R6.2 91.151,80.326 91.654,80.829 91.654,88.404 92.25,89 93.65,89 94.9,87.75 U3.7
MCU_OSC_IN: C9.1 U3.5 Y1.1 | length 10.9
  L1 (Signal) w0.2: Y1.1 87.15,88.05 87.15,88.725 87.325,88.9 89.75,88.9 90.075,89.225 C9.1@90.075,89.85 ; C9.1 90.075,89.95 C9.1@90.075,89.85 ; U3.5 95.59,88.76 95.065,88.76 94.025,89.8 90.125,89.8 C9.1@90.075,89.85
MCU_OSC_OUT: R8.2 U3.6 | length 6.6
  L1 (Signal) w0.2: R8.2 90.573,87.551 91.076,88.054 91.076,88.551 91.925,89.4 93.852,89.4 95.002,88.25 U3.6
MCU_PA1: J3.1 U3.11 | length 18.5
  L1 (Signal) w0.2: U3.11 95.59,85.76 95.28,85.76 95.265,85.775 95.063,85.775 94.9,85.612 94.9,74.26 95.635,73.525 96.201,73.525 97.801,71.925 99.125,71.925 99.425,71.625 J3.1
MCU_PA2: J3.2 U3.12 | length 18.3
  L1 (Signal) w0.2: U3.12 95.6,74.126 95.801,73.925 98.625,73.925 100.925,71.625 J3.2
MCU_PA3: J3.3 U3.13 | length 16.3
  L1 (Signal) w0.2: U3.13 96.25,79.55 102.125,73.675 102.125,71.125 J3.3
MCU_PA4: J3.4 U3.14 | length 16.7
  L1 (Signal) w0.2: U3.14 96.75,79.975 103.625,73.1 103.625,71.125 J3.4
MCU_PA5: J3.5 U3.15 | length 17.2
  L1 (Signal) w0.2: U3.15 97.25,80.225 105.125,72.35 105.125,71.125 J3.5
MCU_PA6: J3.6 U3.16 | length 17.9
  L1 (Signal) w0.2: U3.16 97.75,80.468 102.145,76.073 102.702,76.073 106.625,72.15 106.625,71.125 J3.6
MCU_PA7: J3.7 U3.17 | length 18.7
  L1 (Signal) w0.2: U3.17 98.25,80.534 102.311,76.473 103.577,76.473 108.425,71.625 J3.7
MCU_PA8: J3.8 U3.29 | length 22.4
  L1 (Signal) w0.2: U3.29 107.3,87.25 108.325,86.225 108.325,73.225 109.925,71.625 J3.8
MCU_PA9: J3.9 U3.30 | length 23.8
  L1 (Signal) w0.2: U3.30 107.725,87.75 108.95,86.525 108.95,74.1 111.425,71.625 J3.9
MCU_PA10: J3.10 U3.31 | length 25.2
  L1 (Signal) w0.2: U3.31 108.175,88.25 109.525,86.9 109.525,75 111.062,73.463 111.087,73.463 112.925,71.625 J3.10
MCU_VCAP1: C11.1 U3.22 | length 2.4
  L1 (Signal) w0.25: 100.475,83.725 100.75,84 U3.22
  L1 (Signal) w0.3: C11.1 99.501,82.775 100.451,83.725 100.475,83.725
USB_CC1: J1.A5 R2.1 | length 21.7
  L1 (Signal) w0.2: R2.1 111.949,102.876 111.446,103.379 111.446,103.53 110.55,104.426 110.55,105.425 111.25,106.125 113.5,106.125 115.25,107.875 117.375,107.875 118.5,106.75 118.5,101.225 116.75,99.475 J1.A5
USB_CC2: J1.B5 R3.1 | length 4.8
  L1 (Signal) w0.2: R3.1 112.252,105.076 114.853,102.475 J1.B5
USB_D_N: J1.A7 J1.B7 U3.32 | length 24.6
  L1 (Signal) w0.267: U3.32 102.409,88.759 102.684,88.759 102.69,88.765 106.015,88.765 107.509,90.259 107.509,96.594 109.195,98.28 113.075,98.28 114.058,99.263 114.058,100.132 114.911,100.985 115.107,100.985 115.359,100.985 115.369,100.975 J1.A7 ; 115.107,100.984 114.891,100.768 114.891,100.187 115.087,99.991 115.784,99.991 J1.B7
USB_D_P: J1.A6 J1.B6 U3.33 | length 25.3
  L1 (Signal) w0.267: U3.33 102.409,89.241 102.684,89.241 102.69,89.235 105.82,89.235 107.039,90.454 107.039,96.789 109,98.75 112.88,98.75 113.588,99.458 113.588,100.327 114.745,101.484 115.791,101.484 J1.B6 ; J1.A6 115.816,100.491 116.513,100.491 116.709,100.687 116.709,101.263 116.513,101.459 115.836,101.459 J1.B6@115.82,101.475
VBUS: C1.1 FB1.1 J1.A4-B9 J1.B4-A9 | length 7.6
  L1 (Signal) w0.3: J1.A4-B9 115.95,98.475 116.56,98.475 116.785,98.699 116.991,98.699 117.492,99.2 v1(117.6,99.2) ; J1.B4-A9 115.95,102.975 116.52,102.975 117.35,102.145 117.35,101.725 v1(117.4,101.675)
  L4 (Signal) w0.3: v1(117.4,101.675) 118.1,100.975 118.1,99.7 v1(117.6,99.2)
XTAL_IN: C10.1 R8.1 Y1.3 | length 4.8
  L1 (Signal) w0.2: Y1.3 90.374,85.575 R8.1 90.651,85.449 91.154,84.946 91.154,84.204 90.425,83.475 C10.1
pads on no net: BT1. J1. J1.1 J1.2 J1.3 J1.4 J1.A8 J1.B8 S1.4 S1.5 U2.2 U2.3 U2.4 U2.5 U2.6 U2.7 U2.14 U2.15 U2.16 U2.17 U2.19 U2.21 U2.22 U3.2 U3.3 U3.4 U3.10 U3.18 U3.19 U3.20 U3.21 U3.25 U3.28 U3.41 U3.46

## Polygon pours and split planes (outlines as drawn)
GND on L1 (Signal) "GND_L01_P009" (solid, remove dead copper, pour order 9): 109.875,94.675 109.85,94.65 109.85,93.05 109.55,92.75 109.625,92.675 109.625,91.8 109.325,91.5 108.775,91.5 108.275,92 108.275,94.5 108.45,94.675 109.825,94.675
GND on L1 (Signal) "GND_L01_P008" (solid, remove dead copper, pour order 8): 110.475,107.9 112.85,107.9 113.05,107.7 113.05,106.625 112.9,106.475 110.575,106.475 110.05,105.95 110.05,102.225 110.8,101.475 112.85,101.475 113.025,101.3 113.025,100.2 112.825,100 110.225,100 109.65,100.575 109.65,107.25 110.325,107.925
GND on L1 (Signal) "GND_L01_P007" (solid, remove dead copper, pour order 7): 118.85,83.925 117.275,83.925 117,83.65 117,82.425 117.175,82.25 119.725,82.25 120.4,82.925 120.4,87.6 119.925,88.075 117.6,88.075 117.2,88.475 117.25,88.525 117.25,90.125 116.825,90.55 114.6,90.55 114.275,90.875 114.275,92.05 115,92.775 116.05,92.775 116.275,93 116.275,94.05 116.175,94.15 115.2,94.15 114.925,94.425 114.925,97.05 115.075,97.2 117.025,97.2 117.375,97.55 117.375,98.05 117.35,98.05 117.15,98.25 116.775,98.25 116.375,97.85 115.175,97.85 114.525,97.2 114.525,95.625 113.6,94.7 113.6,92.55 113.15,92.1 112.1,92.1 111.95,91.95 111.95,90.6 112.05,90.5 114,90.5 114.525,89.975 114.525,88.525 114.975,88.075 116.775,88.075 117.15,87.7 117.15,86.775 117.35,86.575 118.9,86.575 119.35,86.125 119.35,84.425 118.825,83.9
+3V3 on L1 (Signal) "+3V3_L01_P004" (solid, remove dead copper, pour order 4): 112.25,90.125 112.25,83.925 111.95,83.625 110.7,83.625 110.55,83.475 110.55,81.9 110.725,81.725 112.125,81.725 112.225,81.625 112.225,80.05 112.35,79.925 113.7,79.925 113.85,80.075 113.85,81.625 114.05,81.825 115.3,81.825 115.35,81.875 115.35,83.25 116.9,84.8 118.675,84.8 118.763,84.888 118.763,85.837 118.625,85.975 116.35,85.975 113.75,88.575 113.75,90.025 113.65,90.125
+5V on L1 (Signal) "+5V_L01_P001" (solid, remove dead copper, pour order 1): 111.775,97.525 111.8,97.5 111.8,94.85 111.525,94.575 111.525,88.375 109.95,88.375 109.95,92.65 110.15,92.85 110.15,97.475 110.2,97.525
VBUS on L1 (Signal) "VBUS_L01_P000" (solid, pour order 0): 116.4,98.65 116.4,98 114.55,98 113.725,97.175 113.725,95.5 113.4,95.175 113.4,92.975 112,92.975 111.925,93.05 111.925,95.025 112.075,95.175 112.075,97.875 113.4,97.875 114.175,98.65 115.075,98.65
GND on L4 (Signal) "GND_L02_P011" (solid, pour order 11): 69,70.5 ccw(c70.75,70.5) 70.75,68.75 120.25,68.75 ccw(c120.25,70.5) 122,70.5 122,109.75 ccw(c120.25,109.75) 120.25,111.5 70.75,111.5 ccw(c70.75,109.75) 69,109.75

## Silkscreen, mask and mechanical layers (free items; w line width, h text height)
Top Overlay:
  region: 3511 vertices and 2 holes, not listed, extent 117.885,74.29 121.083,79.315
  text "RS" at 103.23,109.07 h1 r90
  text "DO" at 105.73,109.07 h1 r90
  text "3V" at 108.33,109.07 h1 r90
  text "BO" at 70.454,105.154 h1.52
  text "OT" at 78.854,105.154 h1.52
  text "JTAG" at 100.746,102.754 h1.52 r90
  text "BATT" at 69.554,99.754 h1.52
  text "PWR" at 90.381,97.804 h1
  text "GND" at 103.33,97.27 h1 r90
  text "CLK" at 105.73,97.27 h1 r90
  text "MODE" at 90.37,96.37 h1
  text "JTMS" at 108.33,96.27 h1 r90
  text "BAT" at 86.73,95.17 h1 r90
  text "USB" at 90.37,95.03 h1 r270
  text "USB" at 117.554,92.454 h1.52
Mechanical 1:
  the board outline again, w0.254

## Text inside footprints (layer, text, board x,y; h text height)
BT1: Top Overlay "+" at 77.1,101.167 h1 r180